# EAGLE board SPM_final (EAGLE 6.1)
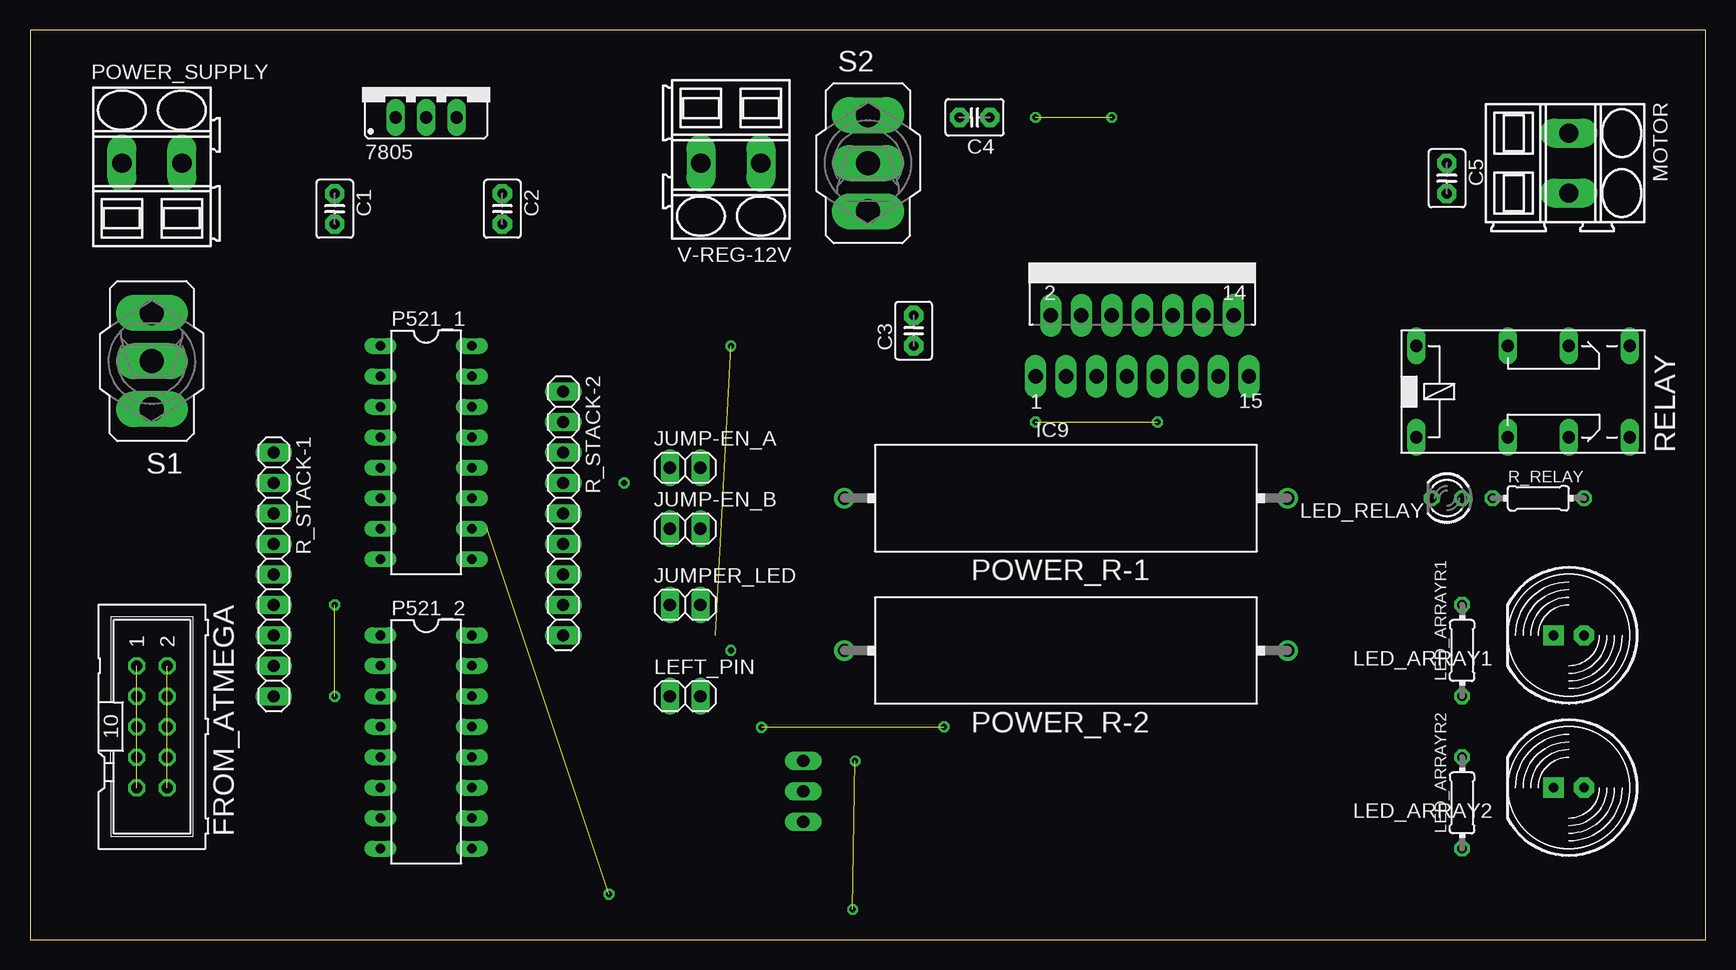
[diagram p0: board, top side]
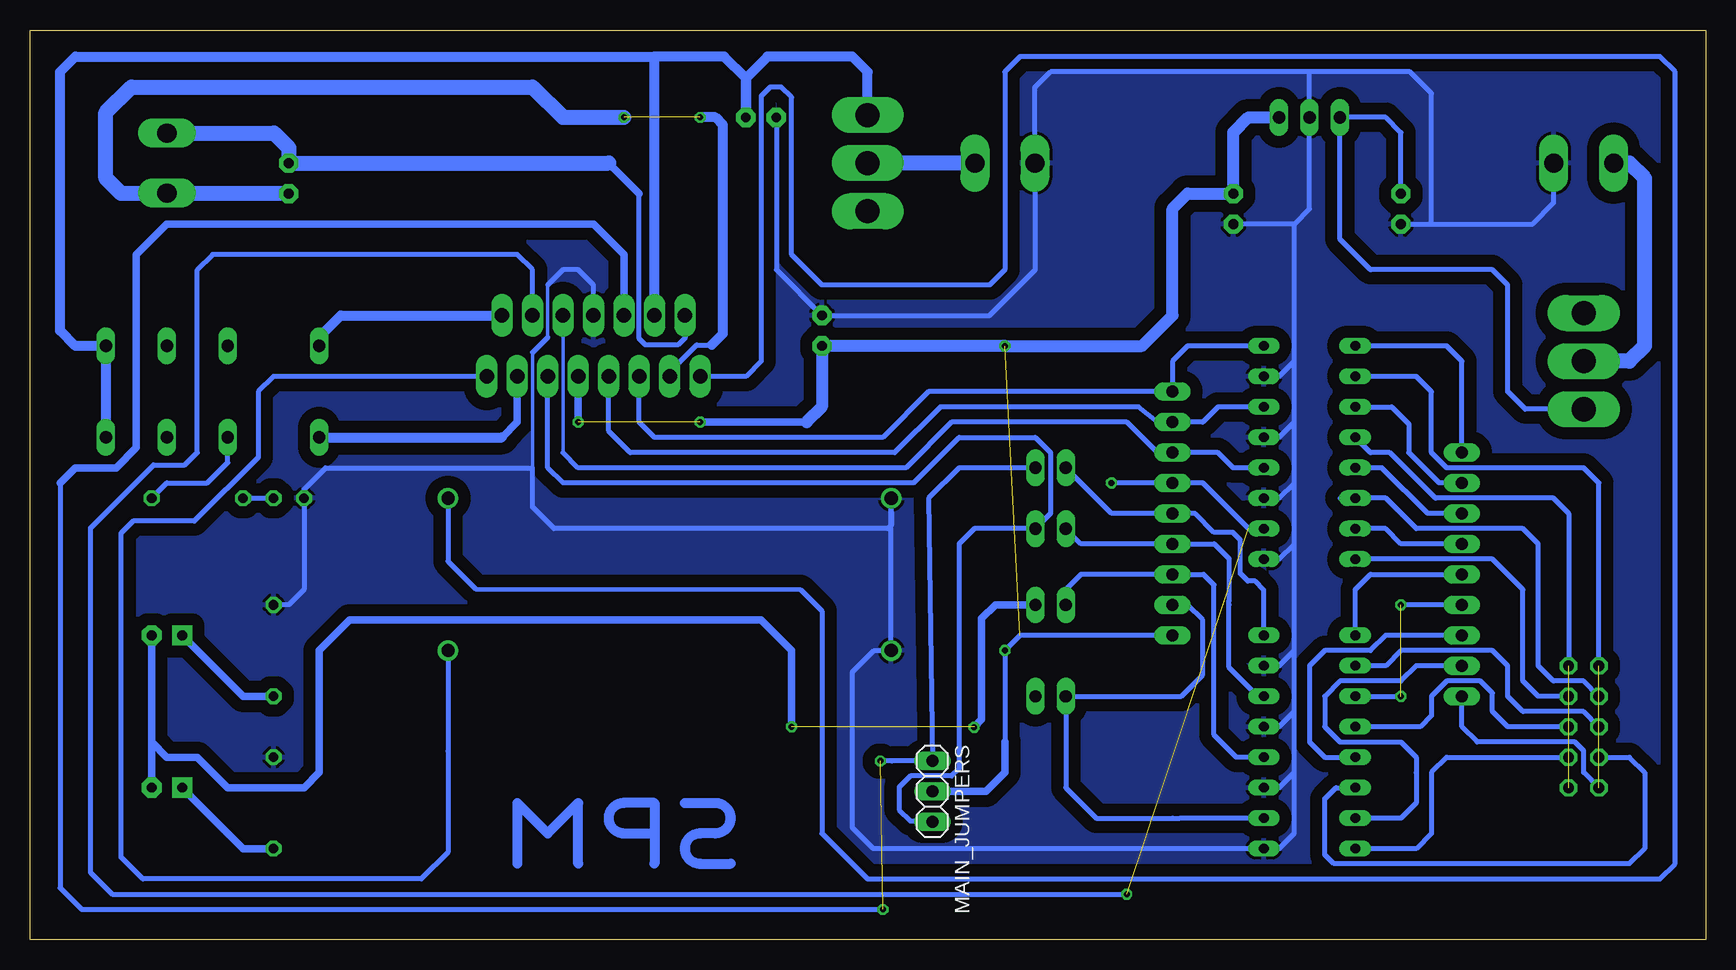
[diagram p1: board, bottom side, seen from below]

Size 139.68 x 75.87 mm. Coordinates in mm from the lower left corner, seen from the top.
Outline: 0,0 139.68,0 139.68,75.87 0,75.87 0,0
Copper layers (1*16): Top 0.035mm / dielectric 1.5mm / Bottom 0.035mm
Design rules: minimum track width 10mil, minimum drill 24mil, track to track 8mil, track to pad 8mil, pad to pad 8mil, via to via 8mil, smd to smd 8mil, copper to edge 40mil, drill to drill 8mil, minimum pad ring 10mil, minimum via ring 8mil, stop-mask expansion 4mil, vias tented up to drill 0mil, thermal gap 10mil

## Footprints (pad centres in the part's own frame; a part is rotated, then mirrored left to right if it is on the bottom)
78XXS = drill 1.016 long: GND 0,-2.54; IN -2.54,-2.54; OUT 2.54,-2.54
C2.5-3 = drill 0.813 pad 1.6 octagon: 1 -1.27,0; 2 1.27,0
ML10 = drill 0.914 octagon: 1 -5.08,-1.27; 2 -5.08,1.27; 3 -2.54,-1.27; 4 -2.54,1.27; 5 0,-1.27; 6 0,1.27; 7 2.54,-1.27; 8 2.54,1.27; 9 5.08,-1.27; 10 5.08,1.27
MULTIWATT-15 = drill 1.2 long: 1 -8.89,-7.62; 2 -7.62,-2.54; 3 -6.35,-7.62; 4 -5.08,-2.54; 5 -3.81,-7.62; 6 -2.54,-2.54; 7 -1.27,-7.62; 8 0,-2.54; 9 1.27,-7.62; 10 2.54,-2.54; 11 3.81,-7.62; 12 5.08,-2.54; 13 6.35,-7.62; 14 7.62,-2.54; 15 8.89,-7.62
1X02 = drill 1.016 long: 1 -1.27,0; 2 1.27,0
LED10MM = drill 0.813 pad 1.676 octagon: A -1.27,0 | drill 0.813 pad 1.676 square: K 1.27,0
0204/7 = drill 0.813 octagon: 1 -3.81,0; 2 3.81,0
LED3MM = drill 0.813 octagon: A -1.27,0; K 1.27,0
1X03 = drill 1.016 long: 1 -2.54,0; 2 0,0; 3 2.54,0
SMKDSP_1,5/2 = drill 1.6 pad 1.8 long: 1 -2.5,0; 2 2.5,0
DIL16 = drill 0.813 long: 1 -8.89,-3.81; 2 -6.35,-3.81; 3 -3.81,-3.81; 4 -1.27,-3.81; 5 1.27,-3.81; 6 3.81,-3.81; 7 6.35,-3.81; 8 8.89,-3.81; 9 8.89,3.81; 10 6.35,3.81; 11 3.81,3.81; 12 1.27,3.81; 13 -1.27,3.81; 14 -3.81,3.81; 15 -6.35,3.81; 16 -8.89,3.81
HPS932 = drill 1.1 pad 1.7: 1 -18.47,0; 2 18.47,0
1X09 = drill 1.016 long: 1 -10.16,0; 2 -7.62,0; 3 -5.08,0; 4 -2.54,0; 5 0,0; 6 2.54,0; 7 5.08,0; 8 7.62,0; 9 10.16,0
351 = drill 1.016 long: 1 -3.81,-3.81; 16 -3.81,3.81; O1 8.89,-3.81; O2 8.89,3.81; P1 3.81,-3.81; P2 3.81,3.81; S1 13.97,-3.81; S2 13.97,3.81
320-916 = drill 2.007 long: 1 0,4.013; 2 0,0; 3 0,-4.013

## Placement (x,y rotation side)
7805  [78XXS]  33.02,71.12 0 top
C1  0.33uF  [C2.5-3]  25.4,60.96 270 top
C2  0.1uF  [C2.5-3]  39.37,60.96 270 top
C3  100nF  [C2.5-3]  73.66,50.8 90 top
C4  100nF  [C2.5-3]  78.74,68.58 180 top
C5  [C2.5-3]  118.11,63.5 270 top
FROM_ATMEGA  [ML10]  10.16,17.78 270 top
IC9  L298  [MULTIWATT-15]  92.71,54.61 0 top
JUMP-EN_A  [1X02]  54.61,39.37 0 top
JUMP-EN_B  [1X02]  54.61,34.29 0 top
JUMPER_LED  [1X02]  54.61,27.94 0 top
LED_ARRAY1  [LED10MM]  128.27,25.4 180 top
LED_ARRAY2  [LED10MM]  128.27,12.7 180 top
LED_ARRAYR1  330  [0204/7]  119.38,24.13 90 top
LED_ARRAYR2  330  [0204/7]  119.38,11.43 90 top
LED_RELAY  [LED3MM]  118.11,36.83 180 top
LEFT_PIN  [1X02]  54.61,20.32 0 top
MAIN_JUMPERS  [1X03]  64.46,12.39 270 bottom
MOTOR  SMKDSP_1,5/2  [SMKDSP_1,5/2]  128.27,64.77 270 top
P521_1  [DIL16]  33.02,40.64 270 top
P521_2  [DIL16]  33.02,16.51 270 top
POWER_R-1  [HPS932]  86.36,36.83 180 top
POWER_R-2  [HPS932]  86.36,24.13 180 top
POWER_SUPPLY  SMKDSP_1,5/2  [SMKDSP_1,5/2]  10.16,64.77 0 top
R_RELAY  330  [0204/7]  125.73,36.83 0 top
R_STACK-1  [1X09]  20.32,30.48 270 top
R_STACK-2  [1X09]  44.45,35.56 270 top
RELAY  351  [351]  119.38,45.72 0 top
S1  [320-916]  10.16,48.26 180 top
S2  [320-916]  69.85,64.77 0 top
V-REG-12V  SMKDSP_1,5/2  [SMKDSP_1,5/2]  58.42,64.77 180 top

## Library data of the parts
7805 = v-reg
C1-C5 = capacitor-wima
FROM_ATMEGA = con-harting-ml; OC_FARNELL: unknown; OC_NEWARK: unknown
IC9 = st-microelectronics; MPN: L298N; OC_FARNELL: 1589425; OC_NEWARK: 32M1527
JUMP-EN_A JUMP-EN_B JUMPER_LED LEFT_PIN MAIN_JUMPERS R_STACK-1 R_STACK-2 = pinhead
LED_ARRAY1 LED_ARRAY2 LED_RELAY = led
LED_ARRAYR1 LED_ARRAYR2 R_RELAY = resistor
MOTOR POWER_SUPPLY V-REG-12V = con-phoenix-smkdsp; MF: FARNELL; MPN: 1733570; OC_FARNELL: 3041244; OC_NEWARK: 69C8588
P521_1 P521_2 = ic-package
POWER_R-1 POWER_R-2 = resistor-power; OC_FARNELL: unknown; OC_NEWARK: unknown
RELAY = relay; OC_FARNELL: unknown; OC_NEWARK: unknown
S1 S2 = switch

## Nets
GND1: 7805.GND C1.2 C2.2 C3.2 C4.2 IC9.8 LED_ARRAYR1.2 LED_ARRAYR2.2 LED_RELAY.K P521_1.9 P521_1.11 P521_1.13 P521_1.15 P521_2.9 P521_2.11 P521_2.13 P521_2.15 POWER_R-1.2 POWER_R-2.2 POWER_SUPPLY.2 V-REG-12V.2
N$1: FROM_ATMEGA.1 P521_1.2
N$2: FROM_ATMEGA.2 P521_1.4
N$3: FROM_ATMEGA.3 P521_1.6
N$4: FROM_ATMEGA.4 P521_1.8
N$5: FROM_ATMEGA.5 P521_2.2
N$6: FROM_ATMEGA.6 P521_2.4
N$7: FROM_ATMEGA.7 P521_2.6
N$8: FROM_ATMEGA.8 P521_2.8
N$9: FROM_ATMEGA.9 R_STACK-1.9
N$10: P521_1.1 R_STACK-1.1
N$11: P521_1.3 R_STACK-1.2
N$12: P521_1.5 R_STACK-1.3
N$13: P521_1.7 R_STACK-1.4
N$14: P521_2.1 R_STACK-1.5
N$15: P521_2.3 R_STACK-1.6
N$16: P521_2.5 R_STACK-1.7
N$17: P521_2.7 R_STACK-1.8
N$18: C4.1 IC9.4 RELAY.S1 RELAY.S2 S2.1
N$19: JUMPER_LED.2 LED_ARRAY1.A LED_ARRAY2.A
N$20: IC9.5 P521_1.16 R_STACK-2.1
N$21: IC9.7 P521_1.14 R_STACK-2.2
N$22: IC9.10 P521_1.12 R_STACK-2.3
N$23: IC9.12 P521_1.10 R_STACK-2.4
N$24: JUMP-EN_A.1 P521_2.16 R_STACK-2.5
N$25: JUMP-EN_B.1 P521_2.14 R_STACK-2.6
N$26: JUMPER_LED.1 P521_2.12 R_STACK-2.7
N$27: LEFT_PIN.1 P521_2.10 R_STACK-2.8
N$28: C5.1 IC9.2 MOTOR.1
N$29: C5.2 IC9.3 MOTOR.2
N$30: IC9.13 RELAY.1
N$31: IC9.11 JUMP-EN_B.2 MAIN_JUMPERS.3
N$32: IC9.6 JUMP-EN_A.2 MAIN_JUMPERS.1
N$33: IC9.14 RELAY.16
N$34: LED_ARRAY1.K LED_ARRAYR1.1
N$35: IC9.1 POWER_R-1.1
N$36: IC9.15 POWER_R-2.1
N$37: 7805.IN C1.1 S1.1
N$38: LED_RELAY.A R_RELAY.1
N$39: R_RELAY.2 RELAY.P1
N$40: POWER_SUPPLY.1 S1.2
N$41: S2.2 V-REG-12V.1
N$42: LED_ARRAY2.K LED_ARRAYR2.1
VCC: 7805.OUT C2.1 C3.1 IC9.9 MAIN_JUMPERS.2 R_STACK-2.9

## Tracks (layer width: path | path; a pad name or v marks a point on that pad's centre or on a via)
GND1
  Bottom 0.305: 97.79,39.37 97.79,48.98 | 96.52,54.61 96.52,50.24
  Bottom 0.406: C1.2 22.86,59.69 | 22.86,59.69 14.43,59.69 12.66,61.46 POWER_SUPPLY.2 | 22.86,59.69 22.86,70.59 24.66,72.39 33.02,72.39 | 34.29,59.69 33.02,60.96 7805.GND 33.02,72.39 | 34.29,59.69 C2.2 | C4.2 77.47,55.88 C3.2 59.69,52.07 55.88,55.88 55.88,64.73 V-REG-12V.2 55.92,71.08 54.61,72.39 33.02,72.39 | P521_1.15 35.56,46.99 34.29,48.26 | 34.29,48.26 34.29,59.69 | P521_1.13 35.56,41.91 34.29,43.18 | 34.29,43.18 34.29,48.26 | P521_1.11 35.56,36.83 34.29,38.1 | 34.29,38.1 34.29,43.18 | P521_1.9 35.56,31.75 34.29,33.02 | 34.29,33.02 34.29,38.1 | 34.29,13.97 34.29,8.89 35.56,7.62 P521_2.9 69.39,7.62 71.12,9.35 71.12,22.33 69.32,24.13 POWER_R-2.2 POWER_R-1.2 67.85,34.6 68.16,34.29 95.99,34.29 97.79,36.09 97.79,39.37 115.04,39.37 116.84,37.57 LED_RELAY.K 116.84,29.21 118.11,27.94 LED_ARRAYR1.2 | 34.29,13.97 34.29,19.05 | 34.29,19.05 34.29,24.13 | 34.29,24.13 34.29,33.02 | P521_2.11 35.56,12.7 34.29,13.97 | P521_2.13 35.56,17.78 34.29,19.05 | P521_2.15 35.56,22.86 34.29,24.13 | IC9.8 92.71,54.61 93.98,55.88 95.25,55.88 96.52,54.61 | 96.52,50.24 97.79,48.98
  pour Bottom (isolate 1.016): 1.27,74.93 1.27,3.81 1.27,2.54 2.54,1.27 137.16,1.27 138.43,2.54 138.43,74.93 137.16,76.2 2.54,76.2
N$1
  Bottom 0.406: FROM_ATMEGA.1 8.89,38.1 10.16,39.37 21.59,39.37 22.86,40.64 22.86,45.72 24.13,46.99 P521_1.2
N$2
  Bottom 0.406: P521_1.4 27.94,40.64 26.34,40.64 22.53,36.83 12.7,36.83 11.43,35.56 FROM_ATMEGA.2
N$3
  Bottom 0.406: 30.48,36.83 P521_1.6 26.67,36.83 24.13,34.29 15.24,34.29 13.97,33.02 13.97,22.86 12.7,21.59 10.16,21.59 FROM_ATMEGA.3
N$4
  Bottom 0.406: FROM_ATMEGA.4 13.97,20.32 15.24,21.59 15.24,29.21 17.78,31.75 P521_1.8
N$5
  Bottom 0.406: FROM_ATMEGA.5 10.16,19.05 15.24,19.05 16.51,20.32 16.51,22.86 17.78,24.13 25.4,24.13 26.67,22.86 P521_2.2
N$6
  Bottom 0.406: FROM_ATMEGA.6 16.51,17.78 17.78,19.05 17.78,20.6 18.77,21.59 21.59,21.59 22.86,20.32 22.86,18.71 23.79,17.78 P521_2.4
N$7
  Bottom 0.406: FROM_ATMEGA.7 6.35,15.24 5.08,13.97 5.08,7.62 6.35,6.35 30.99,6.35 31.75,7.11 31.75,11.78 30.83,12.7 P521_2.6
N$8
  Bottom 0.406: FROM_ATMEGA.8 21.59,15.24 22.86,13.97 22.86,8.89 24.13,7.62 P521_2.8
N$9
  Bottom 0.406: R_STACK-1.9 20.32,17.78 19.05,16.51 10.89,16.51 10.16,15.78 10.16,13.97 FROM_ATMEGA.9
N$10
  Bottom 0.406: R_STACK-1.1 20.32,48.26 21.59,49.53 P521_1.1
N$11
  Bottom 0.406: R_STACK-1.2 22.21,38.1 24.75,40.64 24.73,40.67 24.73,43.01 26.16,44.45 P521_1.3
N$12
  Bottom 0.406: 27.94,39.37 P521_1.5 26.98,39.37 23.17,35.56 R_STACK-1.3
N$13
  Bottom 0.406: R_STACK-1.4 25.4,33.02 26.67,34.29 P521_1.7
N$14
  Bottom 0.406: P521_2.1 29.21,29.21 27.94,30.48 R_STACK-1.5
N$15  (via drill 0.5)  (1 unrouted)
  Bottom 0.406: R_STACK-1.6 v25.4,27.94 | P521_2.3 v25.4,20.32
N$16
  Bottom 0.406: R_STACK-1.7 26.67,25.4 27.94,24.13 31.75,24.13 33.02,22.86 33.02,16.51 31.75,15.24 P521_2.5
N$17
  Bottom 0.406: R_STACK-1.8 24.13,22.86 25.4,21.59 30.48,21.59 31.75,20.32 31.75,17.78 30.48,16.51 25.4,16.51 24.13,15.24 24.13,13.97 24.13,11.43 25.4,10.16 27.94,10.16 P521_2.7
N$18
  Bottom 0.813: S2.1 69.85,72.39 71.12,73.66 78.21,73.66 80.01,71.86 | 80.01,71.86 C4.1 80.01,71.86 | IC9.4 87.63,73.66 | RELAY.S1 RELAY.S2 135.89,49.53 137.16,50.8 137.16,72.39 135.89,73.66 87.63,73.66 | 80.01,71.86 81.81,73.66 87.63,73.66
N$19  (via drill 0.5, 0.5 pad 0.61)  (1 unrouted)
  Bottom 0.61: LED_ARRAY2.A LED_ARRAY1.A 129.54,16.51 128.27,15.24 125.73,15.24 123.19,12.7 116.84,12.7 115.57,13.97 115.57,24.13 113.03,26.67 78.74,26.67 76.2,24.13 v76.2,17.78 | JUMPER_LED.2 59.2,27.94 60.35,26.79 60.35,18.39 60.96,17.78
  other vias: 129.54,25.4 55.88,27.94
N$20
  Bottom 0.406: P521_1.16 43.18,49.53 44.45,48.26 R_STACK-2.1 64.77,45.72 68.58,41.91 87.63,41.91 88.9,43.18 IC9.5
N$21
  Bottom 0.406: P521_1.14 40.64,44.45 41.91,43.18 R_STACK-2.2 45.72,43.18 47.28,44.45 63.79,44.45 67.6,40.64 89.64,40.64 91.44,42.44 IC9.7
N$22
  Bottom 0.305: 95.25,40.64 IC9.10
  Bottom 0.406: P521_1.12 39.37,39.37 40.64,40.64 R_STACK-2.3 45.72,40.64 48.26,43.18 62.85,43.18 66.67,39.37 93.98,39.37 95.25,40.64
N$23  (via drill 0.5)  (1 unrouted)
  Bottom 0.406: P521_1.10 38.1,34.29 41.91,38.1 R_STACK-2.4 v49.53,38.1 | IC9.12 97.79,55.88 99.06,57.15 124.46,57.15 125.73,55.88 125.73,40.64 126.77,39.6 129.38,39.6 134.62,34.36 134.62,5.61 132.82,3.81 v48.26,3.81
N$24
  Bottom 0.406: JUMP-EN_A.1 49.53,35.56 R_STACK-2.5 44.43,35.54 42.54,35.54 40.98,33.98 39.41,33.98 38.79,33.35 38.79,30.54 38.16,29.91 37.54,29.91 36.83,29.2 P521_2.16
N$25
  Bottom 0.406: P521_2.14 37.32,20.32 39.73,22.73 39.73,27.94 39.73,28.3 39.73,31.79 40.96,33.02 R_STACK-2.6 52.07,33.02 JUMP-EN_B.1
N$26
  Bottom 0.406: P521_2.12 39.12,15.24 40.98,17.1 40.98,29.6 41.86,30.48 R_STACK-2.7 52.07,30.48 53.34,29.21 JUMPER_LED.1
N$27
  Bottom 0.406: R_STACK-2.8 43.18,27.94 41.91,26.67 41.91,22.12 43.71,20.32 LEFT_PIN.1 53.34,12.7 50.8,10.16 44.45,10.16 43.81,10.16 P521_2.10
N$28
  Bottom 0.406: 88.9,62.23 88.9,50.13 88.37,49.6 85.67,49.6 85.09,50.18 IC9.2
  Bottom 0.61: 91.44,64.77 88.9,62.23
  Bottom 1.27: 91.44,64.77 C5.1 118.11,66.04 119.34,67.27 MOTOR.1
N$29  (via drill 0.5 pad 0.61)  (1 unrouted)
  Bottom 0.406: 128.23,62.23 MOTOR.2 | 86.36,47.34 84.1,49.6 82.85,49.6
  Bottom 0.61: 86.36,47.34 IC9.3
  Bottom 0.813: 82.85,49.6 81.92,50.54 81.92,67.94 82.55,68.58 v83.82,68.58
  Bottom 1.27: 128.23,62.23 C5.2 132.08,62.23 133.35,63.5 133.35,69 131.23,71.12 97.79,71.12 95.25,68.58 v90.17,68.58
N$30
  Bottom 0.61: 100.33,41.91 99.06,43.18 IC9.13
  Bottom 0.813: RELAY.1 100.33,41.91
N$31
  Bottom 0.406: IC9.11 96.52,39.37 95.25,38.1 66.04,38.1 62.23,41.91 55.88,41.91 54.61,40.64 54.61,35.56 JUMP-EN_B.2 60.96,34.29 62.23,33.02 62.23,14.29 62.85,13.66 66.29,13.66 67.23,12.73 67.23,10.85 66.29,9.91 64.52,9.91 MAIN_JUMPERS.3
N$32  (via drill 0.5, 0.5 pad 0.61)  (1 unrouted)
  Bottom 0.406: JUMP-EN_A.2 62.23,39.37 64.77,36.83 MAIN_JUMPERS.1 67.84,14.93 67.85,14.91 v68.79,14.91 | 130.81,57.15 130.81,41.02 132.54,39.29 136.05,39.29 | 137.16,38.1 137.16,4.34 135.36,2.54 v68.58,2.54
  Bottom 0.61: 90.17,51.54 IC9.6 90.17,57.15 92.71,59.69 128.27,59.69 130.81,57.15 130.81,41.05 132.49,39.37 135.89,39.37 137.16,38.1
  other vias: 64.46,14.93
N$33
  Bottom 0.813: RELAY.16 115.57,50.27 113.77,52.07 IC9.14
N$34
  Bottom 0.61: LED_ARRAYR1.1 121.92,20.32 LED_ARRAY1.K
N$35
  Bottom 0.406: POWER_R-1.1 104.83,31.57 102.53,29.27 75.45,29.21 73.66,27.42 73.66,8.89 69.85,5.08 3.81,5.08 2.54,6.35 2.54,72.39 3.81,73.66 57.15,73.66 58.42,72.39 58.42,55.88 59.69,54.61 73.66,54.61 76.2,57.15 76.2,70.27 77.06,71.12 77.98,71.12 78.74,70.36 78.74,48.26 80.01,46.99 IC9.1
N$36
  Bottom 0.406: 104.83,15.75 POWER_R-2.1 104.83,7.32 107.07,5.08 130.28,5.08 132.08,6.88 132.08,33.91 131.08,34.91 125.98,34.91 120.65,40.24 120.65,45.72 119.38,46.99 IC9.15
N$37
  Bottom 0.406: S1.1 15.04,44.25 16.51,45.72 16.51,54.61 17.78,55.88 27.94,55.88 30.48,58.42 7805.IN 26.67,68.58 25.4,67.31 C1.1
N$38
  Bottom 0.406: R_RELAY.1 LED_RELAY.A
N$39
  Bottom 0.406: R_RELAY.2 128.27,38.1 124.9,38.1 123.19,39.81 RELAY.P1
N$40
  Bottom 1.27: POWER_SUPPLY.1 6.35,64.77 5.08,63.5 5.08,49.53 6.35,48.26 S1.2
N$41
  Bottom 1.27: V-REG-12V.1 S2.2
N$42
  Bottom 0.61: LED_ARRAYR2.1 121.92,7.62 LED_ARRAY2.K
N$43
  Bottom 0.813: 85.09,11.43 82.55,11.43 arc90 81.28,10.16 arc90 82.55,8.89 83.82,8.89 arc-90 85.09,7.62 arc-90 83.82,6.35 81.28,6.35
N$44
  Bottom 0.813: 87.63,8.89 87.63,11.43 90.17,11.43 arc-90 91.44,10.16 arc-90 90.17,8.89 87.63,8.89 | 87.63,8.89 87.63,6.35
N$45
  Bottom 0.813: 93.98,6.35 93.98,11.43 96.52,8.89 99.06,11.43 99.06,6.35
N$46  (via drill 0.5 pad 0.61)
  other vias: 60.98,17.73
N$47  (via drill 0.5)  (4 unrouted)
  other vias: 8.89,22.86 8.89,22.86 8.89,20.32 8.89,17.78 8.89,15.24 8.89,12.7
N$48  (via drill 0.5)  (4 unrouted)
  other vias: 11.43,22.86 11.43,22.86 11.43,20.32 11.43,17.78 11.43,15.24 11.43,12.7
VCC  (via drill 0.5, 0.5 pad 0.61)  (2 unrouted)
  Bottom 0.406: R_STACK-2.9 57.15,25.4 v58.42,24.13 58.42,16.51 58.42,15.24
  Bottom 0.61: MAIN_JUMPERS.2 60,12.39 58.42,13.97 58.42,16.51 | 74.93,43.18 v83.82,43.18 | IC9.9 v93.98,43.18
  Bottom 1.016: 7805.OUT 38.1,68.58 39.37,67.31 C2.1 43.18,62.23 44.45,60.96 44.45,52.07 46.99,49.53 v58.42,49.53 C3.1 73.66,44.45 74.93,43.18